# Altium PCB SmartSwitch.PcbDoc
Units mil, origin at the board's own origin, x right, y up, seen from the top; angles counter-clockwise.
Board outline 1889.76 x 1722.44 mil, 2 copper layers (Top Layer, Bottom Layer); 17 components, 14 nets, 66 pads, 76 vias.
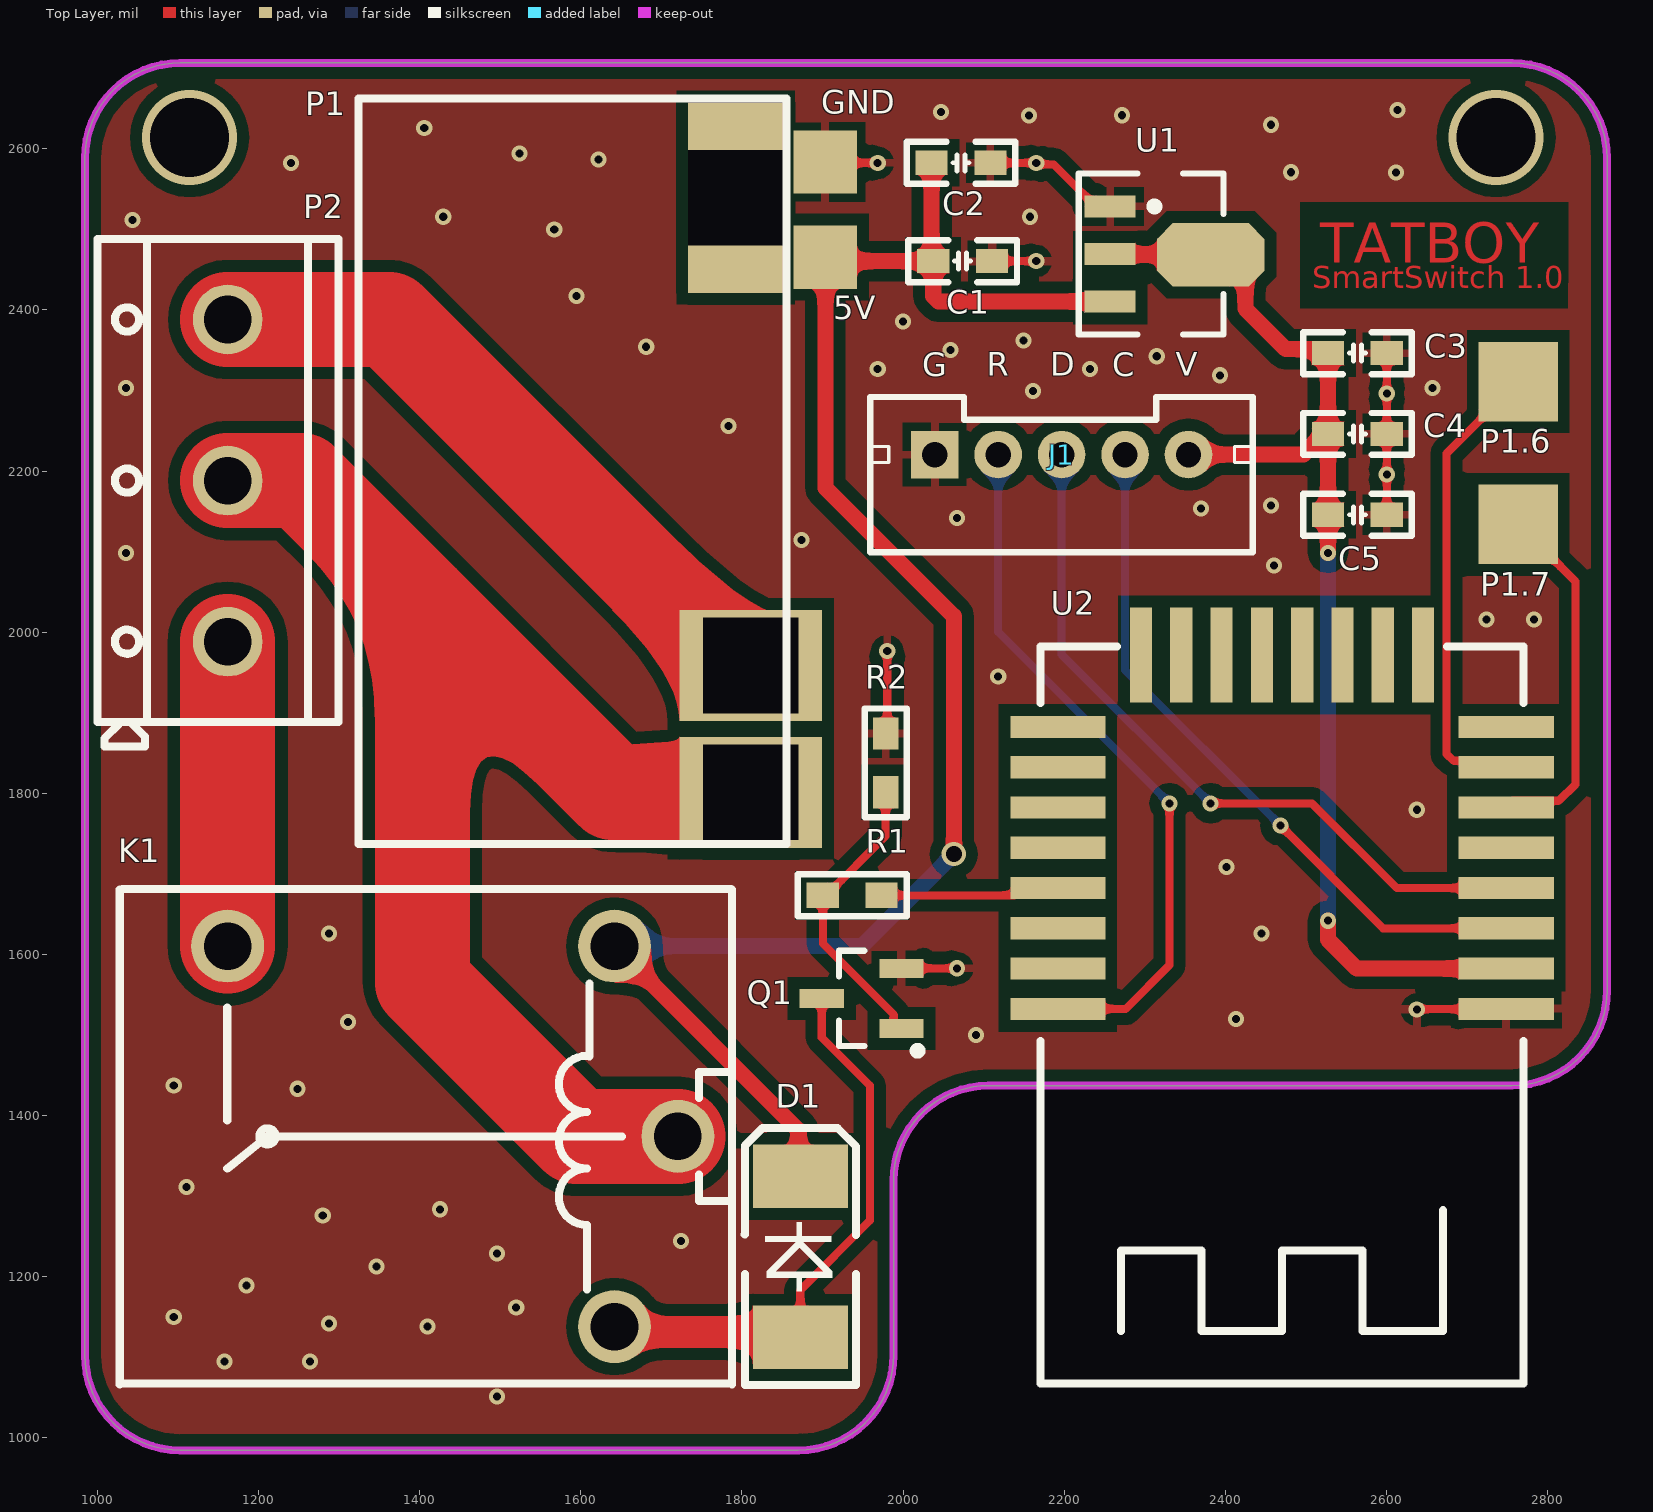
[diagram p0: Top Layer view]
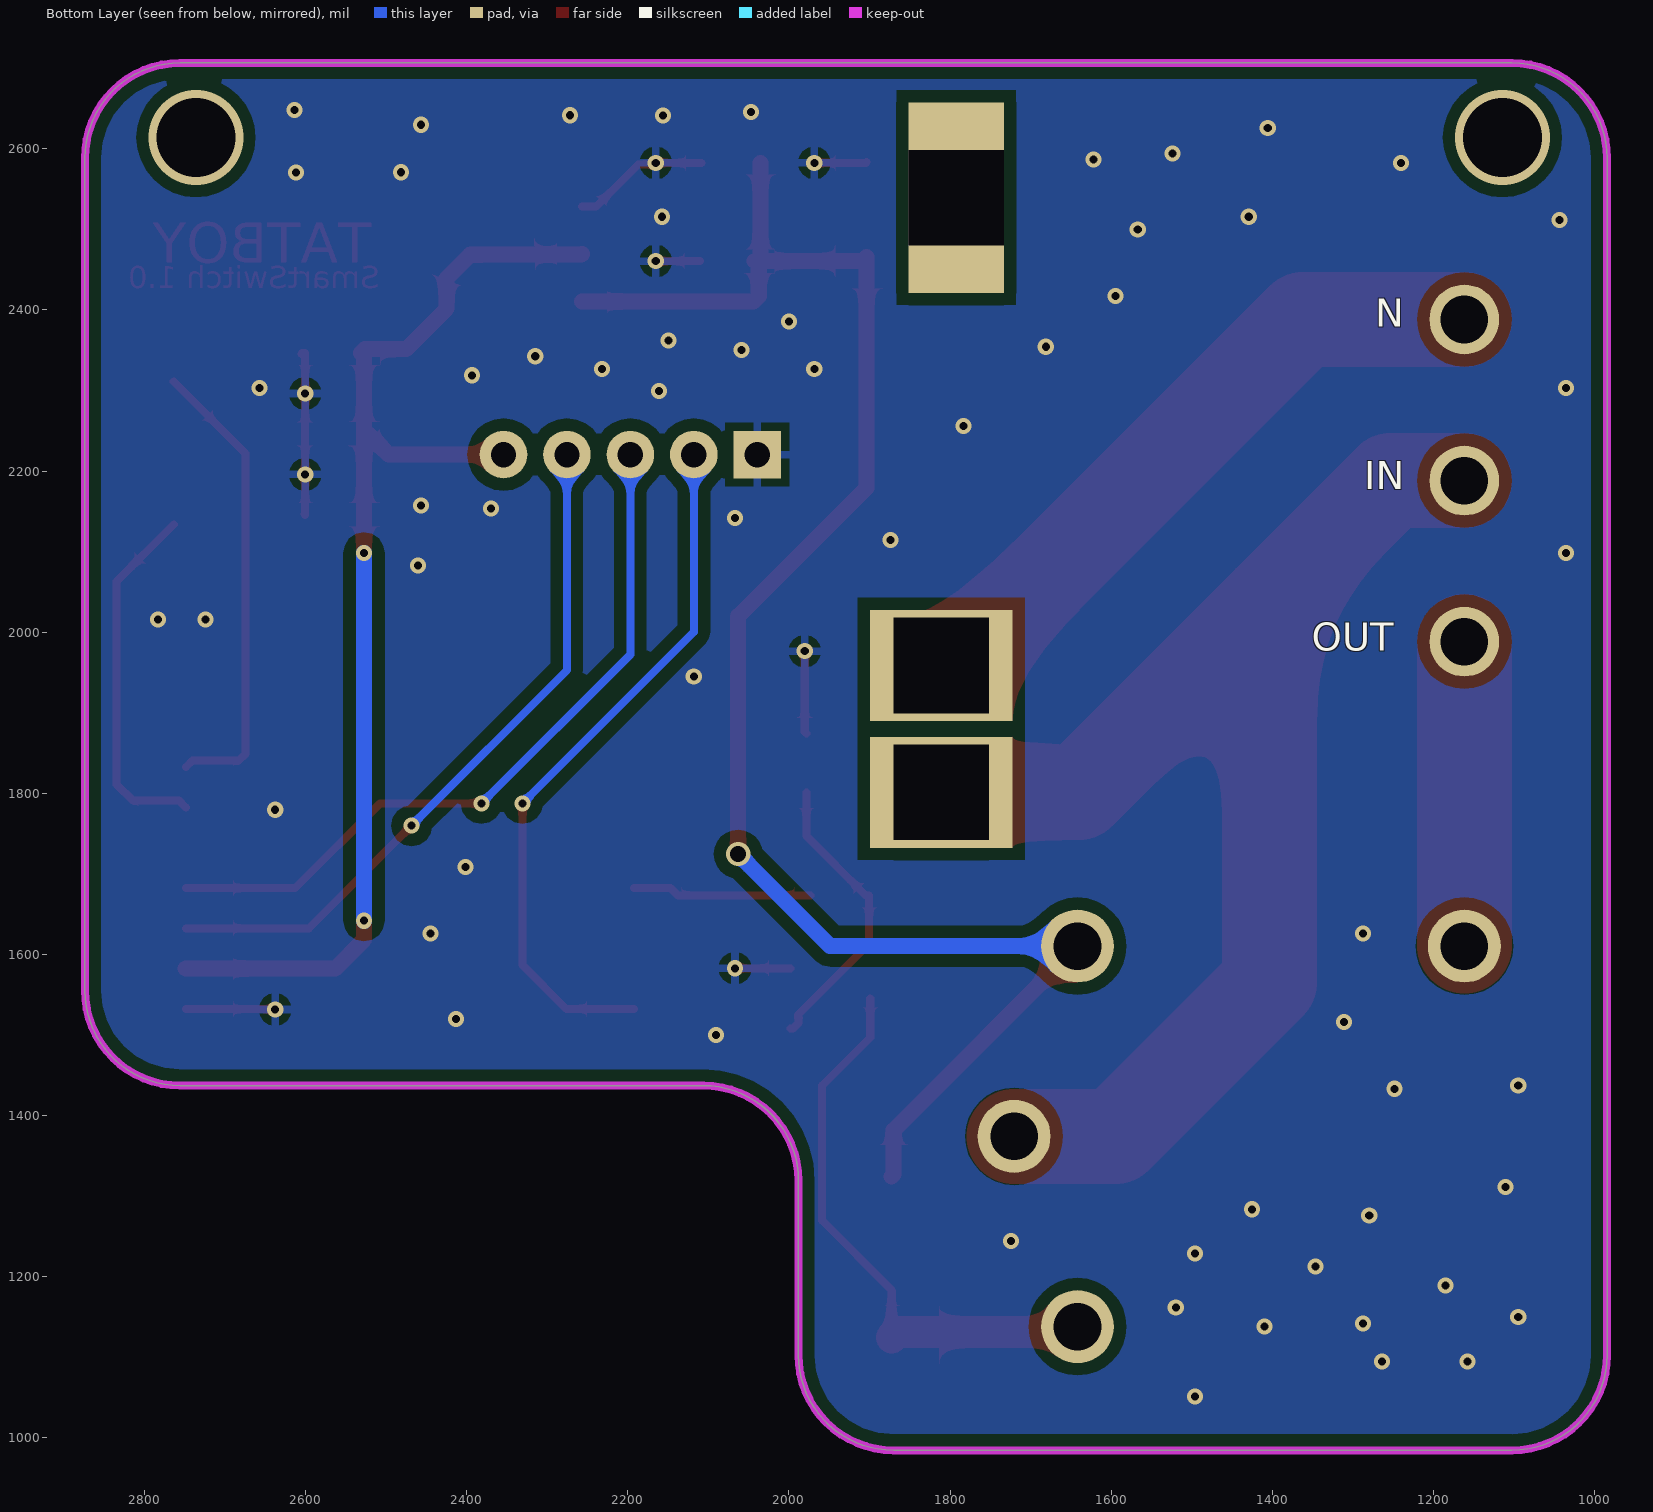
[diagram p1: Bottom Layer view, seen from below]
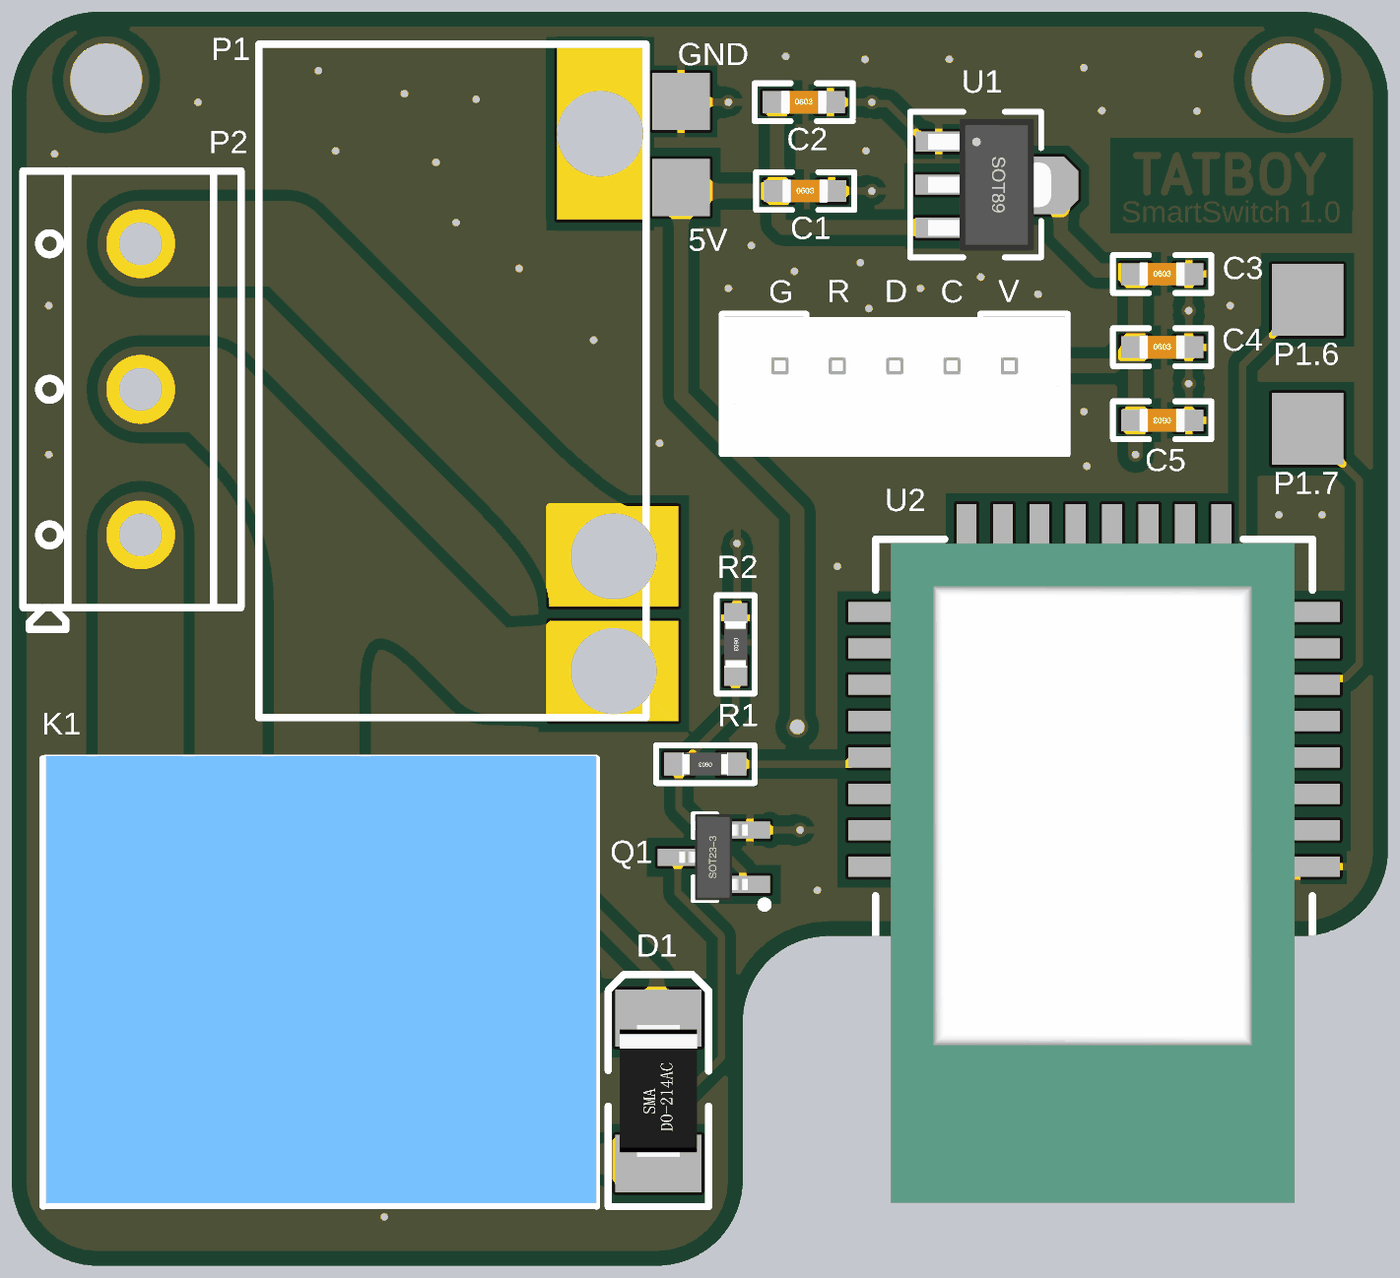
[diagram p2: 3D render of the assembled board from above, using the file's embedded part models]

## Layer stack, top to bottom
Top Solder: solder mask 0.4, Solder Resist, Dk 3.5
Top Layer: signal copper 1.4
Dielectric 1: dielectric 12.6, FR-4, Dk 4.8
Bottom Layer: signal copper 1.4
Bottom Solder: solder mask 0.4, Solder Resist, Dk 3.5

## Board outline
1102.36,984.25 cw(c1102.36,1102.36) 984.25,1102.36 984.25,2588.58 cw(c1102.36,2588.58) 1102.36,2706.69 2755.91,2706.69 cw(c2755.91,2588.58) 2874.02,2588.58 2874.02,1555.12 cw(c2755.91,1555.12) 2755.91,1437.01 2106.3,1437.01 ccw(c2106.3,1318.9) 1988.19,1318.9 1988.19,1102.36 cw(c1870.08,1102.36) 1870.08,984.25

## Design rules (kind name [scope] priority, off if disabled: settings)
Clearance Clearance_1 [InPolygon] p1: gap=15 ignorepadtopadclearanceinfootprint=FALSE
Clearance [All] p2: gap=10 ignorepadtopadclearanceinfootprint=FALSE except(0: Arc-Hole Track-Hole SMDPad-Hole THPad-Hole Via-Hole Fill-Hole Poly-Hole Region-Hole Text-Hole)
HoleSize [All] p1: absolutevalues=TRUE maxlimit=500 minlimit=1 maxpercent=80.000 minpercent=20.000
PolygonConnect [All] p1: connectstyle=Relief reliefconductorwidth=10 reliefentries=4 polygonreliefangle="90 Angle" airgapwidth=10
RoutingVias [All] p1: holewidth=28 width=50 viastyle="Through Hole" minholewidth=1 minwidth=1 maxholewidth=196.85 maxwidth=196.85
SilkToSolderMaskClearance [IsPad] p1: minsilkscreentomaskgap=1 clearancetoexposedcopper=TRUE
SolderMaskExpansion [All] p1: expansion=4 istentingtop=FALSE
Width [All] p1: maxlimit=196.85 minlimit=10 preferedwidth=10
28 further rules are at their usual default settings.

## Components (designator, comment, footprint, x,y, rotation, side; value= is the part's Value field where it differs from the comment)
C1 "10uF" "C 0603_M" 2073.9,2460.63 r0 top
C2 "0.1uF" "C 0603_M" 2071.93,2582.68 r0 top
C3 "0.1uF" "C 0603_M" 2564.06,2346.46 r0 top
C4 "10uF" "C 0603_M" 2564.06,2246.06 r0 top
C5 "10uF" "C 0603_M" 2564.06,2145.67 r180 top
D1 "SS24" "D SMA/DO-214AC" 1872.44,1129.37 r90 top
J1 "PH2.0-5P" PH2.0-LI-5P 2196.85,2220.47 r0 top
K1 "SRD_5VDC_SL_A" K_SRD_XXVDC-XX-A 1440.95,1374.02 r0 top
P1 "AC-DC" AC_DC 1855.31,1727.36 r0 top
P1.6 "TP" TP_BIG 2763.78,2311.02 r0 top (schematic designator TP2)
P1.7 "TP" TP_BIG 2763.78,2133.86 r0 top (schematic designator TP1)
P2 "Header 3" P5.08_3P 1161.42,2188.19 r90 top
Q1 "IRFML8244" SOT23-3M 1998.03,1545.28 r90 top
R1 "100" "R 0603_M" 1936.85,1673.23 r180 top
R2 "10K" "R 0603_M" 1978.35,1837.68 r270 top
U1 "IC_AMS1117" SOT89 2257.02,2528.56 r270 top
U2 "IC_E18-MS1-PCB" E18_MS1_PCB 2470.47,1751.97 r270 top

## Footprints (in the part's own frame and the unit in brackets; to place one, negate y for a bottom-side part, rotate by r counter-clockwise, add the part's x,y. Pads: shape width x height; smd on the part's side, far side on the other; paste and mask are expansions set on the pad)
AC_DC [mm] "220V转5V模块"
  rect 2x2 smd: 1(1.225,21.75) 2(1.225,18.75)
  rect 4.5x3.5 hole 3 square mask+0.102: 3(-1.125,5.875)
  rect 4.5x3.5 hole 3 square paste+0 mask+0.102: 4(-1.125,1.875)
  rect 3x6 hole 3 square mask+0.102: ""(-1.6,20.625)
  silkscreen extent -13.5,0.25 0,23.75
"C 0603_M" [mil] "无极性贴片电容"
  rect 40x30 smd: 1(-36.5,0) 2(36.5,0)
  silkscreen extent -68,-26 68,26, body extent -31,-16 31,16, height 32
"D SMA/DO-214AC" [mm] "塑封二极管"
  rect 2x3 smd: A(-0.127,0) K(4.953,0)
  silkscreen extent -1.63,-1.75 6.48,1.75, body extent 0.11,-1.35 4.71,1.35, height 2.4
E18_MS1_PCB [mm] "Zigbee模块"
  rect 0.7x3 smd: 1(5.579,7.07) 2(4.309,7.07) 3(3.039,7.07) 4(1.769,7.07) 5(0.499,7.07) 6(-0.771,7.07) 7(-2.041,7.07) 8(-3.311,7.07) 17(-3.31,-7.07) 18(-2.04,-7.07) 19(-0.77,-7.07) 20(0.5,-7.07) 21(1.77,-7.07) 22(3.04,-7.07) 23(4.31,-7.07) 24(5.58,-7.07)
  rect 3x0.7 smd: 9(-5.579,4.445) 10(-5.579,3.175) 11(-5.579,1.905) 12(-5.579,0.635) 13(-5.579,-0.635) 14(-5.579,-1.905) 15(-5.579,-3.175) 16(-5.579,-4.445)
  silkscreen extent -5.85,-7.62 17.39,7.62, body extent -5.7,-7.1 17.3,7, height 2.4
K_SRD_XXVDC-XX-A [mm]
  round 2.3 hole 1.5: 1(-7.1,6) 2(5.1,-6) 3(7.1,0) 4(5.1,6)
  silkscreen extent -10.5,-7.82 8.8,7.8, body extent -10.4,-7.72 8.8,7.88, height 15.8
P5.08_3P [mm] "Connector; Header; 3 Position"
  round 2.2 hole 1.5: 1(-5.08,0) 2(0,0) 3(5.08,0)
  silkscreen extent -8.38,-3.5 7.62,4.1
PH2.0-LI-5P [mm] "长：11.9mm，宽：4.7mm，高：6mm"
  rect 1.5x1.5 hole 0.8: 1(-4,0)
  round 1.5 hole 0.8: 2(-2,0) 3(0,0) 4(2,0) 5(4,0)
  silkscreen extent -6.03,-3.08 6.03,1.82, body extent -5.95,-3 5.95,1.7, height 6.01
"R 0603_M" [mil] "1/10W贴片电阻"
  rect 40x31.5 smd: 1(-36.5,0) 2(36.5,0)
  silkscreen extent -68,-26 68,26, body extent -31,-16 32,16, height 16
SOT23-3M [mm] "3x1.3x1mm(长宽高)"
  rect 0.6x1.4 smd: 1(-0.95,0) 2(0.95,0) 3(0,2.514)
  silkscreen extent -1.78,-0.63 1.5,1.97, body extent -1.5,0.07 1.5,2.47, height 1.05
SOT89 [mm]
  rect 0.7x1.6 smd: 1(0,0) 2(1.5,-0.003) 3(3,0)
  oct 2x3.4 smd: 2(1.525,3.172)
  silkscreen extent -1.04,-0.99 4.04,3.58, body extent -0.79,-0.37 3.81,3.93, height 1.6
TP_BIG [mm] "焊盘"
  rect 2.5x2.5 smd: 1(0,0)

## Part data
C1 C2 C3 C4 C5: library part CAP, "电容"
D1: library part DIODE, "普通二极管"
K1: library part K_SRD_5VDC_SL_A, "一组常开", BOM_JLCPCB Part Class="Extended Part", BOM_Manufacturer="Ningbo Songle Relay", BOM_Manufacturer Part=SRD-5VDC-SL-A, BOM_Supplier=LCSC, BOM_Supplier Part=C140615, Contributor=LCSC, spicePre=K, spiceSymbolName=SRD-5VDC-SL-A
P1: library part "Header 4", "Header, 4-Pin", LatestRevisionDate=17-Jul-2002, LatestRevisionNote="Re-released for DXP Platform.", Publisher="Altium Limited"
P1.6 P1.7: "测试点或焊盘"
P2: "Header, 3-Pin", LatestRevisionDate=17-Jul-2002, LatestRevisionNote="Re-released for DXP Platform.", Publisher="Altium Limited"
Q1: library part TX_MOS-N, "NMOS"
R1 R2: library part RES, "电阻"
U1: library part U_LDO_AMS1117, "线性稳压器"
U2: "Zigbee模块"

## Via types
v1: diameter 20, hole 10, Top Layer to Bottom Layer, tented both sides, 73 vias
v2: diameter 118.11, hole 98.43, Top Layer to Bottom Layer, tented both sides, 2 vias
v3: diameter 30, hole 20, Top Layer to Bottom Layer, tented both sides, 1 vias

## Nets (pads, with @x,y where several pads share a name; then routed paths per layer and width w, separated by ;. In a path a pad name is that pad's centre, name@x,y a point inside that pad or via, vN(x,y) a via of type N, cw(c..) or ccw(c..) an arc to the next point about the centre after c; other vN are vias at no path point)
3V3: C3.1 C4.1 C5.2 J1.5 U1.2 U2.2 | length 1495.7
  Top Layer w20: U1.2@2256.89,2469.5 2257.39,2469 2381.39,2469 2381.89,2468.5 2395.62,2468.5 2424.99,2439.13 2424.99,2401.78 2475.32,2351.46 2526.5,2351.46 C3.1@2531.5,2346.46 ; J1.5 2496.97,2220.47 2522.56,2246.06 C4.1 ; v1(2527.56,1641.73) 2527.56,1618.19 2563.44,1582.31 U2.2 ; v1(2527.56,2098.43) C5.2 C4.1 ; C3.1 C4.1
  Bottom Layer w20: v1(2527.56,1641.73) v1(2527.56,2098.43)
+5: C1.1 C2.1 D1.K K1.4 P1.2 U1.3 | length 2187.8
  Top Layer w10: C2.1 C2.1@2037.4,2580.71
  Top Layer w20: K1.4 1870.08,1381.88 1870.08,1326.73 D1.K ; C2.1 2035.43,2465.63 2040.43,2460.63 C1.1@2042.4,2460.63 ; v3(2062.99,1724.41) 2062.99,2019.69 1903.54,2179.13 P1.2 1908.46,2460.63 C1.1 2037.4,2417.23 2044.18,2410.45 U1.3
  Bottom Layer w20: K1.4 1948.82,1610.24 v3(2062.99,1724.41)
DC: J1.4 U2.3 | length 873.7
  Top Layer w10: v1(2468.5,1759.84) 2596.04,1632.31 U2.3
  Bottom Layer w10: J1.4 2275.59,1952.76 v1(2468.5,1759.84)
DD: J1.3 U2.4 | length 920.2
  Top Layer w10: v1(2381.89,1787.4) 2507.87,1787.4 2612.97,1682.31 U2.4
  Bottom Layer w10: J1.3 2196.85,1972.44 v1(2381.89,1787.4)
GND: C1.2 C2.2 C3.2 C4.2 C5.1 J1.1 P1.1 Q1.2 R2.1 U1.1 U2.1 | length 777.9
  Top Layer w10: P1.1 1904.53,2582.68 v1(1968.5,2582.68) ; R2.1 1980.32,1876.15 v1(1980.32,1976.38) ; Q1.2 v1(2066.93,1582.68) ; C2.2 v1(2165.35,2582.68) 2167.27,2580.76 2187.09,2580.76 2239.3,2528.56 U1.1 ; C1.2 v1(2165.35,2460.63) ; C3.2 C4.2 C5.1 C5.1@2601.46,2146.57 ; C3.2@2604.5,2346.46 C3.2@2605.4,2345.56 ; v1(2637.8,1531.5) 2638.2,1531.9 2748.42,1531.9 U2.1
  other v1: 1496.06,1051.18 1157.48,1094.49 1263.78,1094.49 1409.45,1137.8 1287.4,1141.73 1094.49,1149.61 1519.68,1161.42 1185.04,1188.98 1346.46,1212.6 1496.06,1228.35 1724.41,1244.09 1279.53,1275.59 1425.2,1283.46 1110.24,1311.02 1248.03,1433.07 1094.49,1437.01 2090.55,1500 1311.02,1515.75 2413.39,1519.68 1287.4,1625.98 2444.88,1625.98 2401.57,1708.66 2637.8,1779.53 2118.11,1944.88 2724.41,2015.75 2783.46,2015.75 2460.63,2082.68 1035.43,2098.43 1874.02,2114.17 2066.93,2141.73 2370.08,2153.54 2456.69,2157.48 2600.56,2195.87 1783.46,2255.91 2600.56,2296.26 2161.42,2299.21 1035.43,2303.15 2657.48,2303.15 2393.7,2318.9 1968.5,2326.77 2232.28,2326.77 2314.96,2342.52 2059.06,2350.39 1681.1,2354.33 2149.61,2362.2 2000,2385.83 1594.49,2417.32 1566.93,2500 1043.31,2511.81 1429.13,2515.75 2157.48,2515.75 2611.78,2570.46 2481.38,2571 1240.16,2582.68 1622.05,2586.61 1523.62,2594.49 1405.51,2625.98 2456.69,2629.92 2156.2,2641.39 2271.65,2641.73 2047.24,2645.67 2613.97,2648.48
L_IN: K1.3 P1.4 P2.2 | length 1678.8
  Top Layer w118.11: P2.2 1252.76,2188.19 1403.25,2037.69 ; K1.3 1594.49,1374.02 1403.25,1565.25 1403.25,2037.69 ; P1.4 1639.76,1801.18 1403.25,2037.69
L_OUT: K1.1 P2.1 | length 378
  Top Layer w118.11: K1.1 P2.1
N: P1.3 P2.3 | length 827.5
  Top Layer w118.11: P2.3 1361.81,2388.19 1791.34,1958.66 P1.3
NetD1_A: D1.A K1.2 Q1.3 | length 717.6
  Top Layer w10: D1.A 1872.44,1183.46 1958.66,1269.68 1958.66,1437.01 1899.06,1496.61 Q1.3
  Top Layer w39.37: K1.2 1648.43,1131.08 1865.73,1131.08 D1.A
NetQ1_1: Q1.1 R1.2 R2.2 | length 370.3
  Top Layer w10: R2.2 1978.35,1746.98 1904.6,1673.23 R1.2 1900.35,1613.43 1988.19,1525.59 1988.19,1514.68 1995,1507.87 Q1.1
NetTP1_1: P1.7.1 U2.6 | length 449.9
  Top Layer w10: U2.6 2757.29,1790.78 2814.4,1790.78 2834.65,1811.02 2834.65,2062.99 P1.7.1
NetTP2_1: P1.6.1 U2.7 | length 579.9
  Top Layer w10: U2.7 2740.55,1840.58 2683.05,1840.58 2674.77,1848.86 2674.77,2222.01 P1.6.1
RESET: J1.2 U2.24 | length 883.1
  Top Layer w10: U2.24 2276.4,1532.3 2330.79,1586.7 v1(2330.79,1787.49)
  Bottom Layer w10: J1.2 2118.11,2000.17 v1(2330.79,1787.49)
SET: R1.1 U2.21 | length 222.5
  Top Layer w10: R1.1 2137.77,1673.23 2146.85,1682.3 U2.21
pads on no net: P1. U2.5 U2.8 U2.9 U2.10 U2.11 U2.12 U2.13 U2.14 U2.15 U2.16 U2.17 U2.18 U2.19 U2.20 U2.22 U2.23
copper on no net:
  other v2: 1114.17,2614.17 2736.22,2614.17

## Polygon pours and split planes (outlines as drawn)
GND on Bottom Layer "GND_L02_P001" (solid, pour order 1): 1102.36,984.25 cw(c1102.36,1102.36) 984.25,1102.36 984.25,2588.58 cw(c1102.36,2588.58) 1102.36,2706.69 2755.91,2706.69 cw(c2755.91,2588.58) 2874.02,2588.58 2874.02,1555.12 cw(c2755.91,1555.12) 2755.91,1437.01 2106.3,1437.01 ccw(c2106.3,1318.9) 1988.19,1318.9 1988.19,1102.36 cw(c1870.08,1102.36) 1870.08,984.25
GND on Top Layer "GND_L01_P000" (solid, pour order 0): 1102.36,984.25 cw(c1102.36,1102.36) 984.25,1102.36 984.25,2588.58 cw(c1102.36,2588.58) 1102.36,2706.69 2755.91,2706.69 cw(c2755.91,2588.58) 2874.02,2588.58 2874.02,1555.12 cw(c2755.91,1555.12) 2755.91,1437.01 2106.3,1437.01 ccw(c2106.3,1318.9) 1988.19,1318.9 1988.19,1102.36 cw(c1870.08,1102.36) 1870.08,984.25

## Keep-outs
Keep-Out Layer:
  the board outline again, w10

## Other copper
Top Layer:
  text "TATBOY" at 2517.87,2458.82 h50
  text "SmartSwitch 1.0" at 2507.87,2417.84 h47

## Silkscreen, mask and mechanical layers (free items; w line width, h text height)
Top Overlay:
  text "GND" at 1898.54,2633.59 h50
  text "5V" at 1913.39,2378.51 h50
  text "G" at 2023.62,2307.64 h50
  text "R" at 2103.89,2308.2 h50
  text "D" at 2182.63,2308.2 h50
  text "C" at 2259.7,2307.64 h50
  text "V" at 2338.63,2308.2 h50
Bottom Overlay:
  text "N" at 1271.81,2367.6 h60
  text "IN" at 1285.85,2165.35 h60
  text "OUT" at 1351.12,1965.23 h60